# Altium PCB AS5600_AS5601.PcbDoc
Units mm, origin at the board's own origin, x right, y up, seen from the top; angles counter-clockwise.
Board outline 16 x 16 mm, 2 copper layers (Top Layer, Bottom Layer), stack 1.569 mm thick; 16 components, 8 nets, 29 pads, 5 vias.
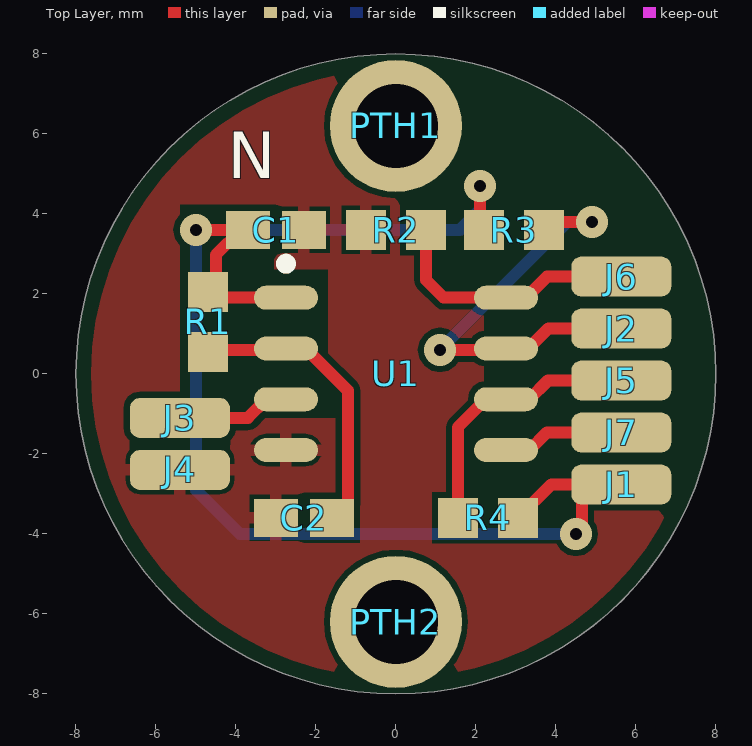
[diagram p0: Top Layer view]
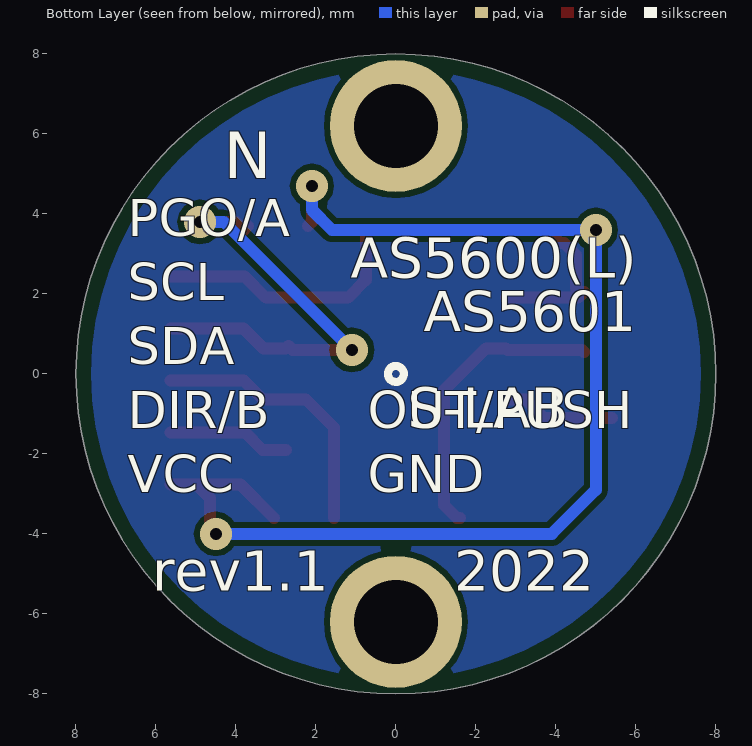
[diagram p1: Bottom Layer view, seen from below]
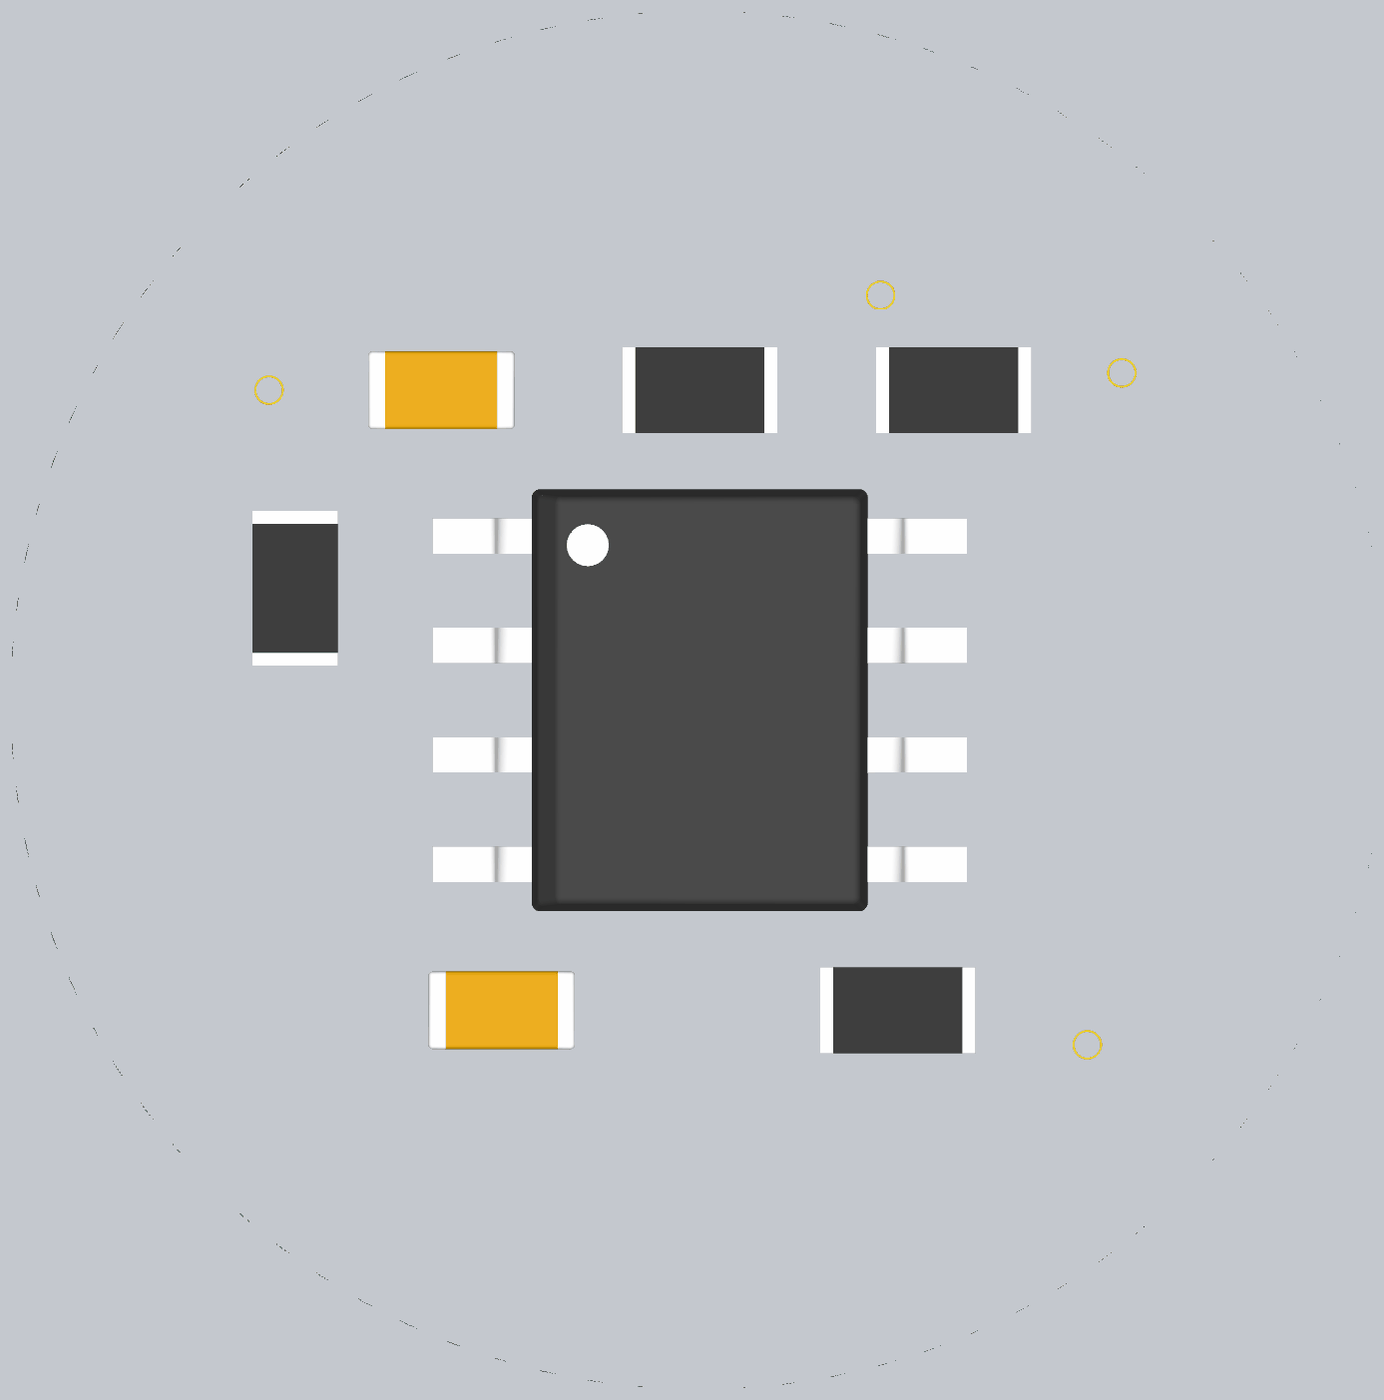
[diagram p2: 3D render of the assembled board from above, using the file's embedded part models]

## Layer stack, top to bottom
Top Solder: solder mask 0.0102, Solder Resist, Dk 3.5
Top Layer: signal copper 0.035
Dielectric 1: core 1.4986, FR-4, Dk 4.3
Bottom Layer: signal copper 0.035
Bottom Solder: solder mask 0.0102, Solder Resist, Dk 3.5

## Board outline
-8,0 ccw(c0,0) 0,-8 ccw(c0,0) 8,0 ccw(c0,0) 0,8 ccw(c0,0)

## Design rules (kind name [scope] priority, off if disabled: settings)
Clearance [All] p1: gap=0.15 ignorepadtopadclearanceinfootprint=TRUE
ComponentClearance [All] p1: gap=0 collisioncheckmode=3 verticalgap=0 showdistances=FALSE
MinimumSolderMaskSliver [All] p1: minsoldermaskwidth=0.2
PolygonConnect [All] p1: thpad.connectstyle=Relief thpad.reliefconductorwidth=0.4 thpad.reliefentries=4 thpad.polygonreliefangle="90 Angle" thpad.airgapwidth=0.2 smdpad.connectstyle=Relief smdpad.reliefconductorwidth=0.3 smdpad.reliefentries=4 smdpad.polygonreliefangle="90 Angle" smdpad.airgapwidth=0.1 via.connectstyle=Relief via.reliefconductorwidth=0.3 via.reliefentries=4 via.polygonreliefangle="90 Angle" via.airgapwidth=0.1
RoutingVias [All] p1: holewidth=0.3 width=0.8 viastyle="Through Hole" minholewidth=0.2 minwidth=0.4 maxholewidth=0.7 maxwidth=1.3
SolderMaskExpansion [All] p1: expansion=0.102 istentingtop=FALSE
Width [All] p1: maxlimit=0.3 minlimit=0.15 preferedwidth=0.2
28 further rules are at their usual default settings.

## Classes and differential pairs
component class AS5600_AS5601: C1 C2 J1 J2 J3 J4 J5 J6 J7 PTH1 R1 R2 R3 R4 U1

## Components (designator, comment, footprint, x,y, rotation, side; value= is the part's Value field where it differs from the comment)
C1 "CAP-100N" CAPC0603 -3,3.6 r180 top
C2 "CAP-1U" CAPC0603 -2.3,-3.6 r0 top
J1 "Pad" P_RR-1mm-2.5mm-50% 5.635,-2.765 r0 top
J2 "Pad" P_RR-1mm-2.5mm-50% 5.635,1.135 r0 top
J3 "Pad" P_RR-1mm-2.5mm-50% -5.4,-1.1 r0 top
J4 "Pad" P_RR-1mm-2.5mm-50% -5.4,-2.4 r0 top
J5 "Pad" P_RR-1mm-2.5mm-50% 5.635,-0.165 r0 top
J6 "Pad" P_RR-1mm-2.5mm-50% 5.635,2.435 r0 top
J7 "Pad" P_RR-1mm-2.5mm-50% 5.635,-1.465 r0 top
PTH1 "PTH-M2-D3.3-H2.1" PTH-M2-D4-H2.1#1 11.4,-4.2 r0 top
PTH2 "PTH-M2-D3.3-H2.1" PTH-M2-D4-H2.1#2 11.4,-4.2 r0 top
R1 "RES-0" RES0603 -4.7,1.3 r90 top
R2 "RES-1K" RES0603 0,3.6 r180 top
R3 "RES-4K7" RES0603 2.95,3.6 r180 top
R4 "RES-4K7" RES0603 2.3,-3.6 r0 top
U1 "AS5600(L)/AS5601" SOIC-8-150 0,0 r0 top locked

## Footprints (in the part's own frame and the unit in brackets; to place one, negate y for a bottom-side part, rotate by r counter-clockwise, add the part's x,y. Pads: shape width x height; smd on the part's side, far side on the other; paste and mask are expansions set on the pad)
CAPC0603 [mm] "Chip Capacitor, 2-Leads, Body 1,60x0,80mm, IPC Medium Density"
  rect 1.1x0.95 smd: 1(-0.7,0) 2(0.7,0)
  body extent -0.85,-0.45 0.85,0.45, height 0.9
P_RR-1mm-2.5mm-50% [mm]
  rrect50% 2.5x1 smd: 1(0,0)
PTH-M2-D4-H2.1#1 [mm]
  round 3.3 hole 2.1 mask+0: PTH(-11.4,10.4)
PTH-M2-D4-H2.1#2 [mm]
  round 3.3 hole 2.1 mask+0: PTH(-11.4,-2)
RES0603 [mm] "Chip Resistor, 2-Leads, Body 1,60x0,80mm, IPC Medium Density"
  rect 1x1 smd: 1(-0.75,0) 2(0.75,0)
  body extent -0.9,-0.5 0.9,0.5, height 0.55
SOIC-8-150 [mm] "SOIC, 8-Leads, Body 4,90x3,90mm, Pitch 1,27mm, IPC Medium Density"
  oval 1.6x0.6 smd: 1(-2.75,1.905) 2(-2.75,0.635) 3(-2.75,-0.635) 4(-2.75,-1.905) 5(2.75,-1.905) 6(2.75,-0.635) 7(2.75,0.635) 8(2.75,1.905)
  silkscreen extent -2.87,2.63 -2.62,2.88, body extent -3.1,-2.45 3.1,2.45, height 1.75

## Part data
C1: "Chip Capacitor, 100 nF, +/- 5%", Capacitance="100 nF", Tolerance="5 %", Voltage Rating="50 V", Mount="Surface Mount", Type=Capacitor
C2: "Chip Capacitor, 1 uF, +/- 5%", Capacitance="1 uF", Tolerance="5 %", Voltage Rating="50 V", Mount="Surface Mount", Type=Capacitor
PTH1 PTH2: library part PTH-M2-D4-H2.1
R1: "Chip Resistor, 0 Ohm, +/- 1%", Resistance="0 Ohm", Tolerance="1 %", Voltage Rating="50 V", Mount="Surface Mount", Type=Resistor
R2: "Chip Resistor, 1 KOhm, +/- 1%", Resistance="1 KOhm", Tolerance="1 %", Voltage Rating="50 V", Mount="Surface Mount", Type=Resistor
R3 R4: "Chip Resistor, 4.7 KOhm, +/- 1%", Resistance="4.7 KOhm", Tolerance="1 %", Voltage Rating="50 V", Mount="Surface Mount", Type=Resistor
U1: library part AS5600, "12-bit on-axis magnetic rotary position sensor with analog or PWM output", Mount="Surface Mount", PartNumber=AS5600, Type="Position Sensor"

## Via types
v1: diameter 0.8, hole 0.3, Top Layer to Bottom Layer, tented both sides, 5 vias

## Nets (pads, with @x,y where several pads share a name; then routed paths per layer and width w, separated by ;. In a path a pad name is that pad's centre, name@x,y a point inside that pad or via, vN(x,y) a via of type N, cw(c..) or ccw(c..) an arc to the next point about the centre after c; other vN are vias at no path point)
DIR/B: J7.1 U1.5 | length 3.1
  Top Layer w0.3: U1.5 3.331,-1.905 3.771,-1.465 J7.1
GND: C1.1 C2.1 J4.1 R2.2 U1.4
OUT/PUSH: J3.1 U1.3 | length 2.8
  Top Layer w0.3: J3.1 -3.7,-1.1 -3.235,-0.635 U1.3
PGO/A: J6.1 R2.1 U1.8 | length 6.5
  Top Layer w0.3: R2.1 0.75,2.35 1.195,1.905 U1.8 3.251,1.905 3.781,2.435 J6.1
SCL: J2.1 R3.1 U1.7 | length 11.3
  Top Layer w0.3: v1(1.1,0.6) 2.585,0.6 2.685,0.7 U1.7 3.311,0.635 3.811,1.135 J2.1 ; R3.1@3.7,3.7 3.8,3.6 4,3.8 v1(4.9,3.8)
  Bottom Layer w0.3: v1(1.1,0.6) 4.3,3.8 v1(4.9,3.8)
SDA: J5.1 R4.1 U1.6 | length 6.8
  Top Layer w0.3: R4.1 1.55,-1.335 2.25,-0.635 U1.6 3.331,-0.635 3.801,-0.165 J5.1
VCC_5V_3V3: C1.2 J1.1 R1.2 R3.2 R4.2 U1.1 | length 35.1
  Top Layer w0.3: v1(-5,3.6) -3.875,3.6 -3.875,3.5 -4.1,3.275 -4.2,3.275 -4.5,2.975 -4.5,2.15 R1.2@-4.65,2 ; R1.2 -4.555,1.905 U1.1 ; v1(2.1,4.7) 2.1,3.8 R3.2@2.2,3.7 ; R4.2 3.885,-2.765 J1.1@4.992,-2.765 ; v1@4.6,-4.2 4.5,-4.1 v1(4.5,-4) 4.5,-3.865 4.65,-3.715 4.65,-3.107 J1.1@4.992,-2.765 ; J1.1 J1.1@4.992,-2.765
  Bottom Layer w0.3: v1(2.1,4.7) 2.099,4.699 2.099,4.099 1.6,3.6 v1(-5,3.6) -5,-2.9 -3.9,-4 v1(4.5,-4)
VDD3V3: C2.2 R1.1 U1.2 | length 7.4
  Top Layer w0.3: R1.1 -4.65,0.6 -2.785,0.6 U1.2 -2.25,0.635 -1.2,-0.415 -1.2,-3.275 -1.525,-3.6 C2.2
pads on no net: PTH1.PTH PTH2.PTH

## Polygon pours and split planes (outlines as drawn)
GND on Top Layer "GND_L01_P000" (solid, remove dead copper, pour order 0): 0,-7.62 0.664,-7.591 1.323,-7.504 1.972,-7.36 2.606,-7.16 3.22,-6.906 3.81,-6.599 4.371,-6.242 4.898,-5.837 5.388,-5.388 5.837,-4.898 6.242,-4.371 6.599,-3.81 6.906,-3.22 7.16,-2.606 7.36,-1.972 7.504,-1.323 7.591,-0.664 7.62,0 7.591,0.664 7.504,1.323 7.36,1.972 7.16,2.606 6.906,3.22 6.599,3.81 6.242,4.371 5.837,4.898 5.388,5.388 4.898,5.837 4.371,6.242 3.81,6.599 3.22,6.906 2.606,7.16 1.972,7.36 1.323,7.504 0.664,7.591 0,7.62 -0.664,7.591 -1.323,7.504 -1.972,7.36 -2.606,7.16 -3.22,6.906 -3.81,6.599 -4.371,6.242 -4.898,5.837 -5.388,5.388 -5.837,4.898 -6.242,4.371 -6.599,3.81 -6.906,3.22 -7.16,2.606 -7.36,1.972 -7.504,1.323 -7.591,0.664 -7.62,0 -7.591,-0.664 -7.504,-1.323 -7.36,-1.972 -7.16,-2.606 -6.906,-3.22 -6.599,-3.81 -6.242,-4.371 -5.837,-4.898 -5.388,-5.388 -4.898,-5.837 -4.371,-6.242 -3.81,-6.599 -3.22,-6.906 -2.606,-7.16 -1.972,-7.36 -1.323,-7.504 -0.664,-7.591
GND on Bottom Layer "GND_L02_P002" (solid, pour order 2): 0,7.62 0.664,7.591 1.323,7.504 1.972,7.36 2.606,7.16 3.22,6.906 3.81,6.599 4.371,6.242 4.898,5.837 5.388,5.388 5.837,4.898 6.242,4.371 6.599,3.81 6.906,3.22 7.16,2.606 7.36,1.972 7.504,1.323 7.591,0.664 7.62,0 7.591,-0.664 7.504,-1.323 7.36,-1.972 7.16,-2.606 6.906,-3.22 6.599,-3.81 6.242,-4.371 5.837,-4.898 5.388,-5.388 4.898,-5.837 4.371,-6.242 3.81,-6.599 3.22,-6.906 2.606,-7.16 1.972,-7.36 1.323,-7.504 0.664,-7.591 0,-7.62 -0.664,-7.591 -1.323,-7.504 -1.972,-7.36 -2.606,-7.16 -3.22,-6.906 -3.81,-6.599 -4.371,-6.242 -4.898,-5.837 -5.388,-5.388 -5.837,-4.898 -6.242,-4.371 -6.599,-3.81 -6.906,-3.22 -7.16,-2.606 -7.36,-1.972 -7.504,-1.323 -7.591,-0.664 -7.62,0 -7.591,0.664 -7.504,1.323 -7.36,1.972 -7.16,2.606 -6.906,3.22 -6.599,3.81 -6.242,4.371 -5.837,4.898 -5.388,5.388 -4.898,5.837 -4.371,6.242 -3.81,6.599 -3.22,6.906 -2.606,7.16 -1.972,7.36 -1.323,7.504 -0.664,7.591

## Other copper
Top Layer:
  pour cut-out: 1.8,-2.9 1.8,-4.25 4.5,-4.25 4.5,-2.9
  pour cut-out: -3.3,2.6 -1.7,2.6 -1.7,-1.094 -3.3,-1.094
  pour cut-out: -3.05,4.225 -3.05,-1.052 -5.398,-1.052 -5.398,4.225
  pour cut-out: 2.2,2.848 2.2,-3.302 7.5,-3.302 7.5,2.74

## Silkscreen, mask and mechanical layers (free items; w line width, h text height)
Top Overlay:
  text "N" at -4.2,4.5 h2
Bottom Overlay:
  circle w0.2: c0,0 r0.2
  text "N" at 4.3,4.5 h2
  text "AS5600(L)" at 1.132,2.401 h1
  text "AS5601" at -0.7,1.063 h1
  text "S-LAB" at -0.3,-1.34 h1
  text "OUT/PUSH / GND" at 0.7,-3.266 h1.6
  text "PGO/A / SCL / SDA / DIR/B / VCC" at 6.7,-3.266 h1.6
  text "2022" at -1.463,-5.42 h1
  text "rev1.1" at 6.094,-5.42 h1
BOARD M2:
  circle w0.2: c0,0 r8